# Altium PCB KAILH_SOCKET_PG1350_2024-06-15.pcbdoc
Units mm, origin at the board's own origin, x right, y up, seen from the top; angles counter-clockwise.
Board outline 44.96 x 42.73 mm, 2 copper layers (Top Layer, Bottom Layer); 1 components, 0 nets, 8 pads, 0 vias.
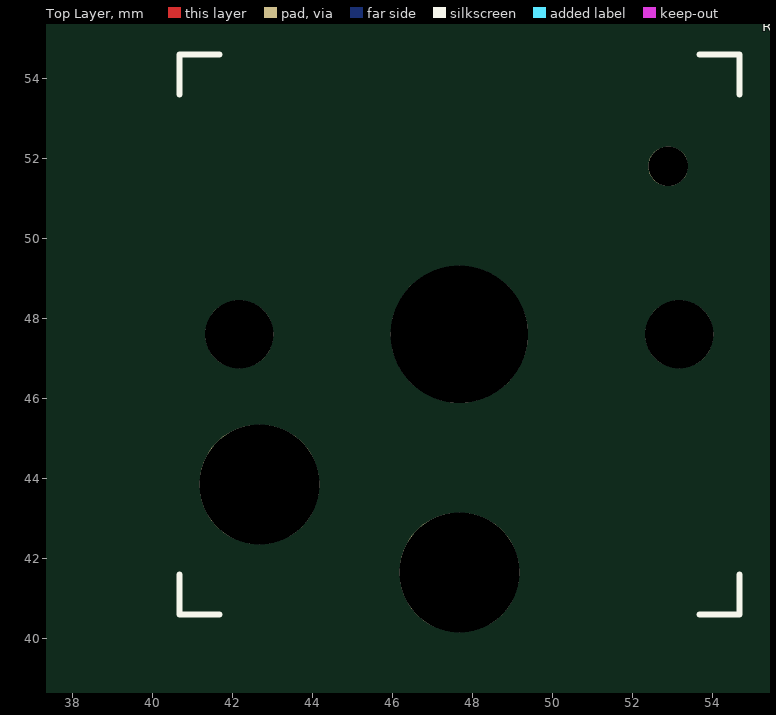
[diagram p0: Top Layer view]
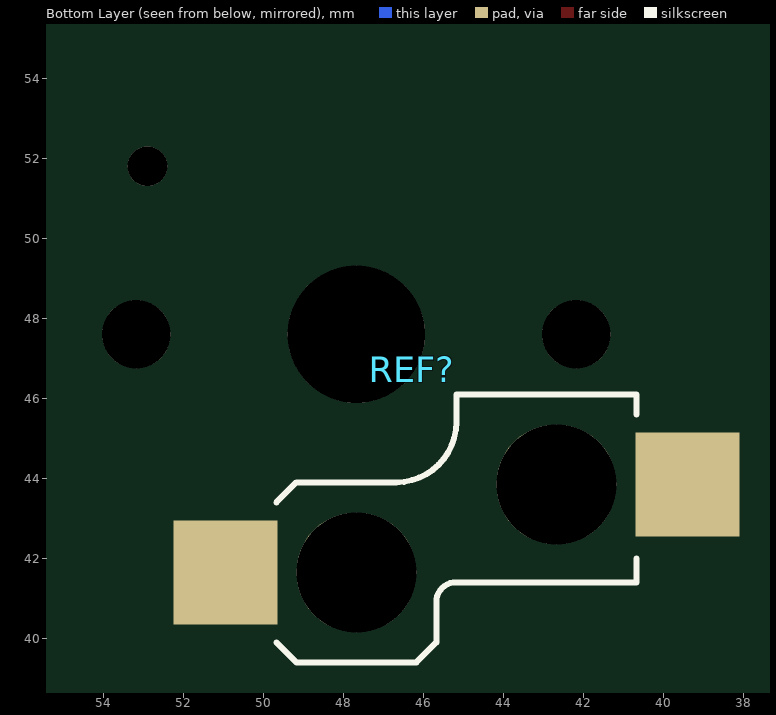
[diagram p1: Bottom Layer view, seen from below]

## Layer stack, top to bottom
Top Layer: signal copper (thickness not stored)
Dielectric: dielectric 0.32, FR-4, Dk 4.8
Bottom Layer: signal copper (thickness not stored)

## Board outline
70.363,25.4 25.4,25.4 25.4,68.129 70.363,68.129

## Components (designator, comment, footprint, x,y, rotation, side; value= is the part's Value field where it differs from the comment)
REF? "KAILH_SOCKET_PG1350" KAILH_SOCKET_PG1350 46.675,46.637 r0 top

## Footprints (in the part's own frame and the unit in brackets; to place one, negate y for a bottom-side part, rotate by r counter-clockwise, add the part's x,y. Pads: shape width x height; smd on the part's side, far side on the other; paste and mask are expansions set on the pad)
KAILH_SOCKET_PG1350 [mil]
  rect 102.36x102.36 smd far side paste+0 mask+2: 1(168.31,-196.35) 2(-286.42,-109.74)
  round 67 hole 67 unplated paste+0: ""(-177.17,37.9) ""(255.91,37.9)
  round 118.1 hole 118.1 unplated paste+0: ""(-157.48,-109.74) ""(39.37,-196.35)
  round 135 hole 135 unplated paste+0: ""(39.37,37.9)
  round 39 hole 39 unplated paste+0: ""(244.88,203.25)
  silkscreen extent -236,-238 315,313

## Nets (pads, with @x,y where several pads share a name; then routed paths per layer and width w, separated by ;. In a path a pad name is that pad's centre, name@x,y a point inside that pad or via, vN(x,y) a via of type N, cw(c..) or ccw(c..) an arc to the next point about the centre after c; other vN are vias at no path point)
pads on no net: REF?. REF?.1 REF?.2

## Text inside footprints (layer, text, board x,y; h text height)
REF?: Document "Kailh_socket_PG1350" at 54.275,39.1 h1 r180; Document "REF" at 45.875,43.1 h1 r180